# Altium PCB Capstone PCB.PcbDoc
Units mil, origin at the board's own origin, x right, y up, seen from the top; angles counter-clockwise.
Board outline 2137 x 2596 mil, 2 copper layers (Top Layer, Bottom Layer); 37 components, 39 nets, 157 pads, 7 vias.
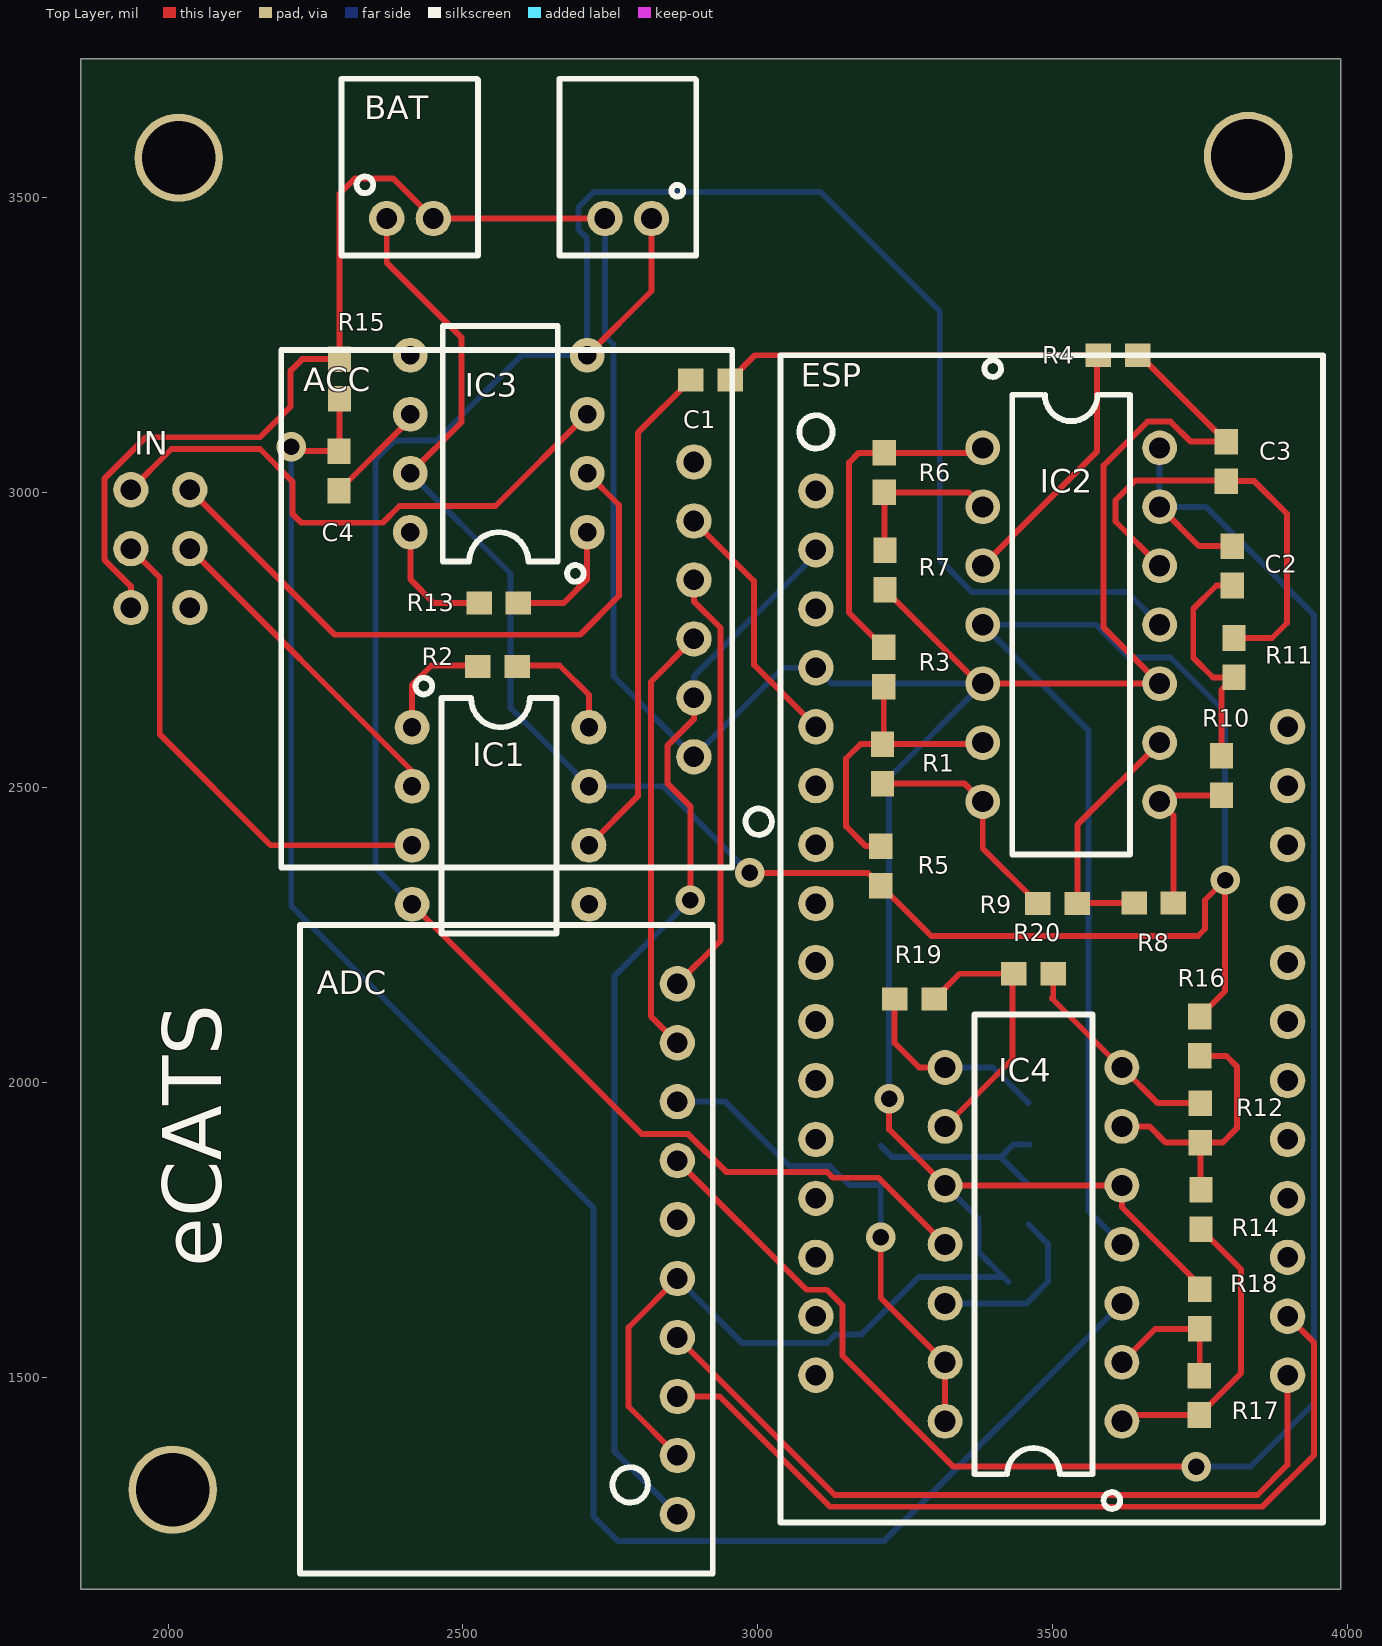
[diagram p0: Top Layer view]
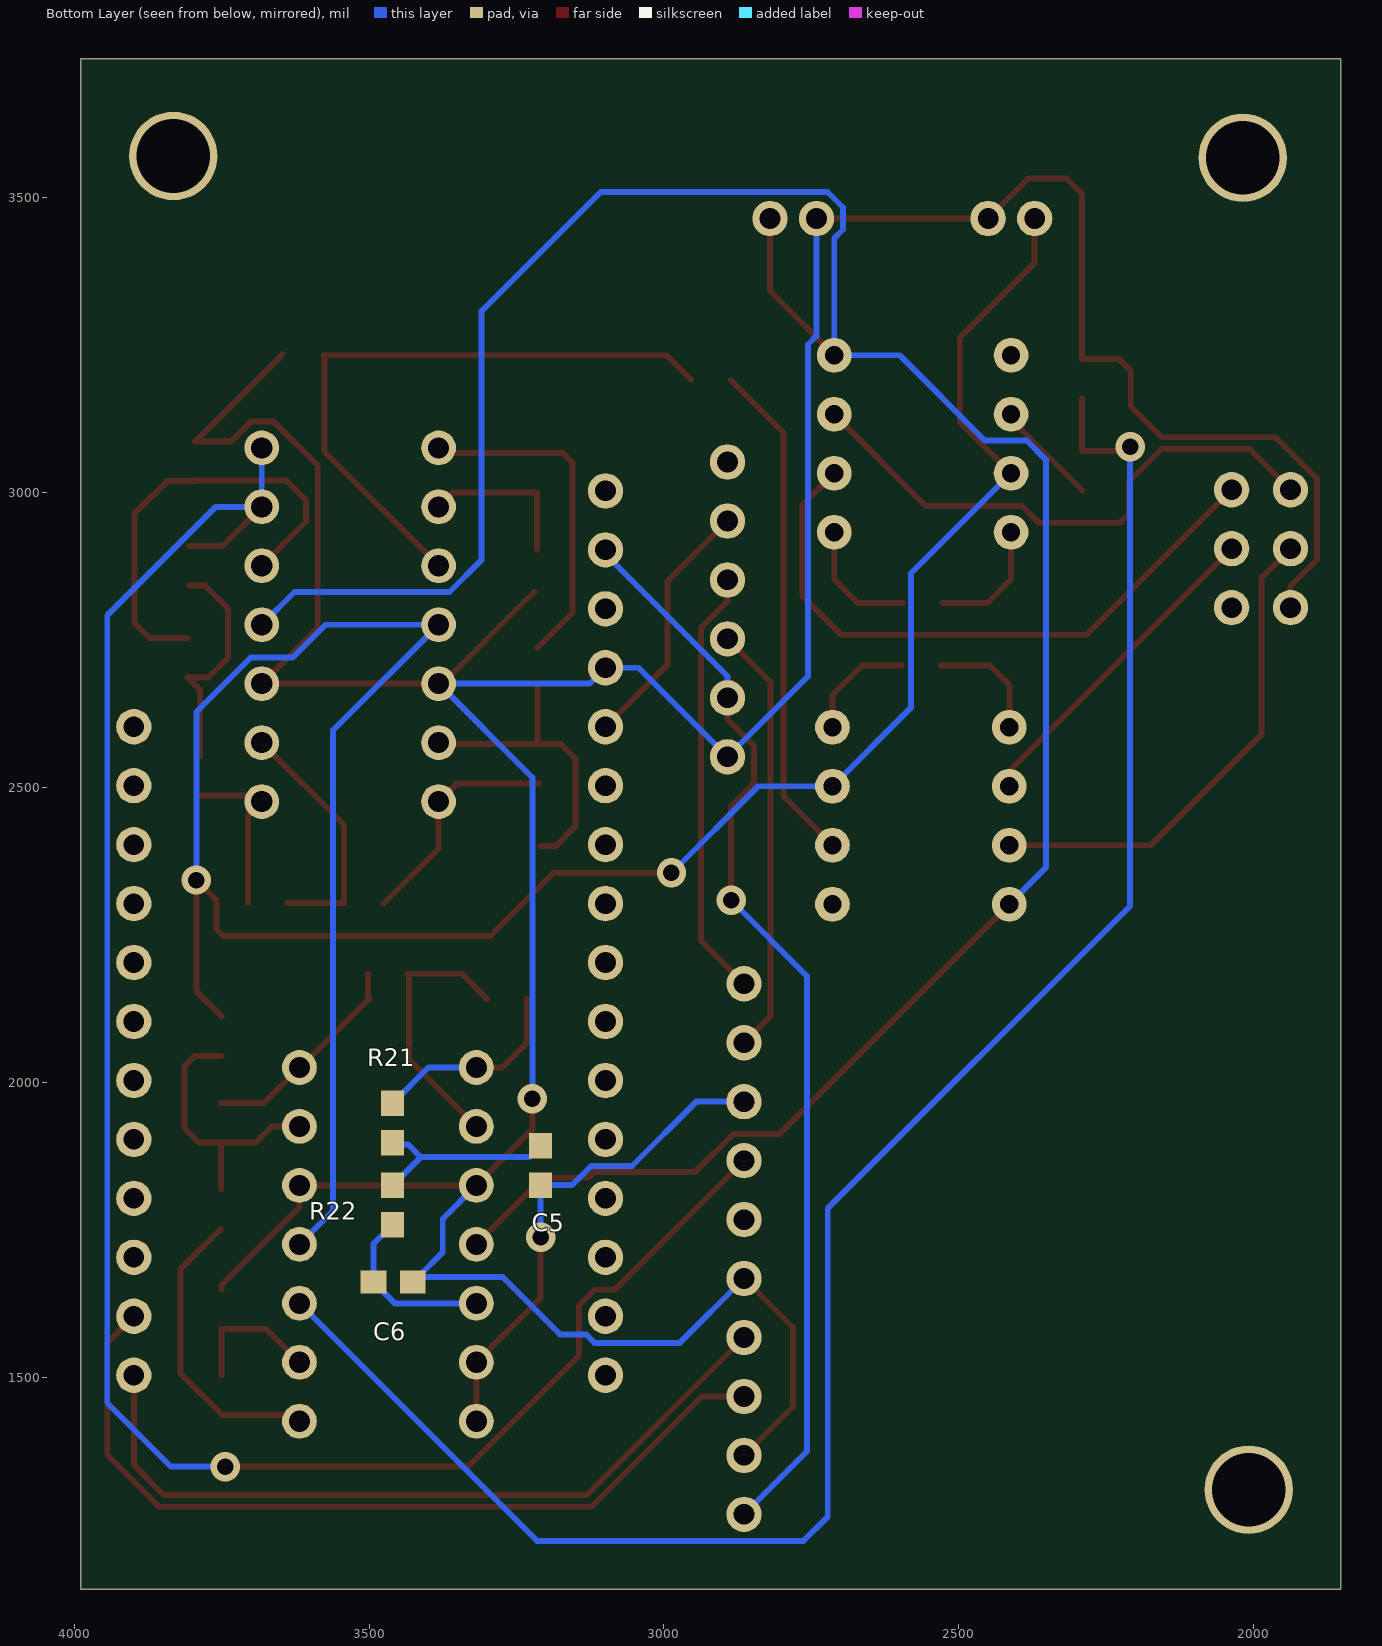
[diagram p1: Bottom Layer view, seen from below]

## Layer stack, top to bottom
Top Solder: solder mask 0.4, Solder Resist, Dk 3.5
Top Layer: signal copper 1.4
Dielectric 1: dielectric 12.6, FR-4, Dk 4.8
Bottom Layer: signal copper 1.4
Bottom Solder: solder mask 0.4, Solder Resist, Dk 3.5

## Board outline
1852,1140 1852,3736 3989,3736 3989,1140

## Design rules (kind name [scope] priority, off if disabled: settings)
Clearance [All] p1: gap=10
ComponentClearance ComponentClearance_1 [All] p1: gap=0 collisioncheckmode=3 verticalgap=0 showdistances=FALSE
ComponentClearance ADCClearance [All] p2: gap=0 collisioncheckmode=3 verticalgap=0 showdistances=FALSE
ComponentClearance ADCClearance2 [InComponent('*3') vs InComponent('IC3')] p3: gap=0 collisioncheckmode=3 verticalgap=0 showdistances=FALSE
ComponentClearance FeatherClearance2 [InComponent('*') vs InComponent('IC4')] p4: gap=0 collisioncheckmode=3 verticalgap=0 showdistances=FALSE
ComponentClearance FeatherClearance1 [InComponent('*') vs InComponent('IC2')] p5: gap=0 collisioncheckmode=3 verticalgap=0 showdistances=FALSE
ComponentClearance [All] p6: gap=10 collisioncheckmode=3 verticalgap=10 showdistances=FALSE
PolygonConnect [All] p1: connectstyle=Relief reliefconductorwidth=10 reliefentries=4 polygonreliefangle="90 Angle" airgapwidth=10
RoutingVias [All] p1: holewidth=28 width=50 viastyle="Through Hole" minholewidth=28 minwidth=50 maxholewidth=250 maxwidth=250
SolderMaskExpansion [All] p1: expansion=4
Width [All] p1: maxlimit=10 minlimit=10 preferedwidth=10
29 further rules are at their usual default settings.

## Components (designator, comment, footprint, x,y, rotation, side; value= is the part's Value field where it differs from the comment)
ACC "ADXL377" ADXL377_Acc 2892,2552 r180 top (schematic designator *1)
ADC "ADC" ADC 2864,1267 r180 top (schematic designator *3)
BAT "BATTERY_JST" BATTERY_JST 2324,3432 r0 top (schematic designator *4)
C1 "2.2nF" CAP_0603 2920,3191 r0 top
C2 "330nF" CAP_0603 3805,2876 r270 top
C3 "Cap" CAP_0603 3795,3053 r270 top
C4 "2.2nF" CAP_0603 2290,3037 r90 top
C5 "Cap" CAP_0603 3209,1859 r90 bottom
C6 "Cap" CAP_0603 3459,1661 r0 bottom
ESP "FEATHER_HUZZAH" Feather_Huzzah 3099,3003 r0 top (schematic designator *)
IC1 "LT1920 OpAmp" LT1920 2414,2602 r0 top
IC2 "TCL2277 OpAmp" TLC2277 3382,3076 r0 top
IC3 "LT1920 OpAmp" LT1920 2711,2933 r180 top
IC4 "TCL2277 OpAmp" TLC2277 3618,1425 r180 top
IN "EEG_INPUT" EEG_INPUT 1937,2805 r90 top (schematic designator *2)
R1 "1k" RES_0603 3212,2540 r270 top
R2 "499ohm" RES_0603 2559,2705 r0 top
R3 "1k" RES_0603 3214,2704 r270 top
R4 "71.5k" RES_0603 3611,3233 r180 top
R5 "2k" RES_0603 3209,2367 r90 top
R6 "1M" RES_0603 3215,3034 r90 top
R7 "4.99k/499ohm" RES_0603 3216,2869 r90 top
R8 "1k" RES_0603 3672,2304 r0 top
R9 "1k" RES_0603 3509,2303 r0 top
R10 "80.6k" RES_0603 3787,2520 r90 top
R11 "178k" RES_0603 3808,2720 r90 top
R12 "1k" RES_0603 3751,1931 r90 top
R13 "499ohm" RES_0603 2561,2813 r180 top
R14 "1k" RES_0603 3752,1784 r90 top
R15 "71.5k" RES_0603 2291,3193 r270 top
R16 "2k" RES_0603 3750,2078 r270 top
R17 "1M" RES_0603 3749,1469 r270 top
R18 "4.99k/499ohm" RES_0603 3750,1615 r270 top
R19 "1k" RES_0603 3266,2141 r180 top
R20 "1k" RES_0603 3468,2184 r180 top
R21 "80.6k" RES_0603 3460,1931 r270 bottom
R22 "178k" RES_0603 3460,1792 r270 bottom

## Footprints (in the part's own frame and the unit in brackets; to place one, negate y for a bottom-side part, rotate by r counter-clockwise, add the part's x,y. Pads: shape width x height; smd on the part's side, far side on the other; paste and mask are expansions set on the pad)
ADC [mil]
  round 60 hole 35: A0(0,-600) A1(0,-700) A2(0,-800) A3(0,-900) ADDR(0,-400) ALRT(0,-500) GND(0,-100) SCL(0,-200) SDA(0,-300) VDD(0,0)
  silkscreen extent -60,-1000 640,100
ADXL377_Acc [mil]
  round 60 hole 35: 3.3V(0,-100) GND(0,0) ST(0,-500) X(0,-200) Y(0,-300) Z(0,-400)
  silkscreen extent -132,-690 700,188
BATTERY_JST [mil]
  round 60 hole 35: GND1(126,33) GND2(417,33) V+(47,33) V-(496,33)
  silkscreen extent -30,-30 572,270
CAP_0603 [mm] "Chip Capacitor, 2-Leads, Body 1.60x0.80mm, IPC Low Density"
  rect 1.1x1 smd: 1(-0.85,0) 2(0.85,0)
  body extent -0.87,-0.48 0.87,0.47, height 0.85
EEG_INPUT [mil]
  round 60 hole 35: 1V+(100,0) 1V-(100,-100) 2V+(200,0) 2V-(200,-100) GND(0,0) NULL(0,-100)
Feather_Huzzah [mil] "ESP8266 Feather Breakout Board"
  round 60 hole 35: 0(800,-1100) 2(800,-1300) 3V(0,-100) 12(800,-800) 13(800,-900) 14(800,-700) 15(800,-1000) 16(800,-1200) ADC(0,-400) BAT(800,-400) CHPD(0,-1500) EN(800,-500) GND(0,-300) M0(0,-1100) M1(0,-1200) NC1(0,-200) NC2(0,-500) NC3(0,-600) NC4(0,-700) NC5(0,-800) NC6(0,-900) RST(0,0) RX(0,-1300) SCK(0,-1000) SCL(800,-1400) SDA(800,-1500) TX(0,-1400) USB(800,-600)
  silkscreen extent -60,-1750 860,230
LT1920 [mm] "LT1920 OpAmp"
  round 1.5 hole 0.783: 1(0,0) 2(0,-2.54) 3(0,-5.08) 4(0,-7.62) 5(7.62,-7.62) 6(7.62,-5.08) 7(7.62,-2.54) 8(7.62,0)
  silkscreen extent 0.15,-8.89 6.22,2.14
RES_0603 [mm] "Chip Resistor, 2-Leads, Body 1.60x0.82mm, IPC Low Density"
  rect 1.1x1 smd: 1(-0.85,0) 2(0.85,0)
  body extent -0.85,-0.48 0.85,0.48, height 0.6
TLC2277 [mm] "TLC2277 OpAmp"
  round 1.5 hole 0.91: 1(0,0) 2(0,-2.54) 3(0,-5.08) 4(0,-7.62) 5(0,-10.16) 6(0,-12.7) 7(0,-15.24) 8(7.62,-15.24) 9(7.62,-12.7) 10(7.62,-10.16) 11(7.62,-7.62) 12(7.62,-5.08) 13(7.62,-2.54) 14(7.62,0)
  silkscreen extent 0.07,-17.53 6.35,3.78

## Part data
C1 C2 C4: library part "CAP SEMI MLCC"
C3 C5 C6: "Capacitor"
IC2 IC4: library part TCL2277
R1 R2 R3 R4 R5 R6 R7 R8 R9 R10 R11 R12 R13 R14 R15 R16 R17 R18 R19 R20 R21 R22: library part "RES SEMI (1.0%)", "1.0%"

## Free pads (board coordinates)
  round 150 hole 125: Hole(2008,1309) Hole(2018,3568) Hole(3832,3571)

## Via types
v1: diameter 50, hole 28, Top Layer to Bottom Layer, 7 vias

## Nets (pads, with @x,y where several pads share a name; then routed paths per layer and width w, separated by ;. In a path a pad name is that pad's centre, name@x,y a point inside that pad or via, vN(x,y) a via of type N, cw(c..) or ccw(c..) an arc to the next point about the centre after c; other vN are vias at no path point)
3V: ACC.3.3V ADC.VDD ESP.3V | length 1854.3
  Top Layer w10: v1(2886,2309) 2886,2468 2847,2507 2847,2570.64 2892,2615.64 ACC.3.3V
  Bottom Layer w10: ADC.VDD 2757,1374 2757,2180 v1(2886,2309) ; ACC.3.3V 2892,2688.36 3099,2895.36 ESP.3V
+VS: BAT.V+ IC1.7 IC2.4 IC3.7 IC4.4 R5.1 R16.1 | length 4584.8
  Top Layer w10: BAT.V+ 2371,3390 2498,3263 2498,3120 IC3.7 ; v1(2987,2355) 3187.54,2355 R5.1 3294.54,2248 3747,2248 3759,2260 3759,2309 v1(3793,2343) 3793,2154.46 R16.1
  Bottom Layer w10: IC3.7 2581,2863 2581,2635 IC1.7 2840,2502 v1(2987,2355) ; IC4.4 3561,1782 3561,2597 IC2.4 3574,2776 3629.47,2720.53 3700.44,2720.53 3793,2627.97 v1(3793,2343)
-VS: BAT.V- IC1.4 IC2.11 IC3.4 IC4.11 | length 4437.1
  Top Layer w10: IC1.4 2804,1912 2882.64,1912 2946.64,1848 3117.64,1848 3127.64,1838 3205,1838 IC4.11 ; IC3.4 2820,3342 BAT.V-
  Bottom Layer w10: IC1.4 2352,2364 2352,3056 2384.47,3088.47 2455.53,3088.47 2600.06,3233 IC3.4 2711,3431.36 2696,3446.36 2696,3483.64 2722.36,3510 3107,3510 3309,3308 3309,2886.03 3363.56,2831.47 3626.53,2831.47 IC2.11
GND: ACC.GND ADC.ADDR ADC.GND BAT.GND1 BAT.GND2 C3.1 C6.1 ESP.GND IC2.5 IC2.10 IC4.5 IC4.10 IN.GND R4.1 R7.1 R15.1 R18.1 | length 7188.1
  Top Layer w10: IN.GND@1915,2805 IN.GND 1937,2841.36 1892,2886.36 1892,3023.64 1962.36,3094 2156,3094 2208,3146 2208,3207 2227.46,3226.46 R15.1 2291,3507 2317,3533 2382,3533 BAT.GND1 BAT.GND2 ; ADC.GND 2781,1450 2781,1584 ADC.ADDR ; R7.1@3220.06,2831.47 IC2.5@3375.54,2676 ; v1(3223,1972) 3223,1920 IC4.10 IC4.5 3618,1787.97 3750,1655.97 R18.1 ; IC2.5 IC2.10 3587,2771 3587,3046 3661.53,3120.53 3700.44,3120.53 3734.51,3086.46 C3.1 R4.1@3646.46,3235
  Bottom Layer w10: BAT.GND2 2741,3265.97 2755.53,3251.44 2755.53,2688.47 ACC.GND 3043,2703 ESP.GND 3126,2676 IC2.5 3223,2517 v1(3223,1972) ; ADC.ADDR 2973,1558 3117.64,1558 3131.64,1572 3175.94,1572 3273.47,1669.53 C6.1@3417.01,1669.53 ; IC4.10 3375,1768 3375,1711.54 C6.1@3417.01,1669.53 ; C6.1 C6.1@3417.01,1669.53
Net*1_X: ACC.X ADC.A2 | length 733.9
  Top Layer w10: ADC.A2 2819,2112 2819,2679 ACC.X
Net*1_Y: ACC.Y ADC.A3 | length 733.9
  Top Layer w10: ADC.A3 2937,2240 2937,2770.64 2892,2815.64 ACC.Y
Net*1_Z: ACC.Z ESP.ADC | length 434.7
  Top Layer w10: ACC.Z 2994,2850 2994,2708 ESP.ADC
Net*2_1V+: IC1.3 IN.1V+ | length 841.2
  Top Layer w10: IN.1V+ 1986,2856 1986,2590 2174,2402 IC1.3
Net*2_1V-: IC1.2 IN.1V- | length 533.2
  Top Layer w10: IN.1V- IC1.2@2414,2528
Net*2_2V+: IC3.3 IN.2V+ | length 962.8
  Top Layer w10: IN.2V+ 2006,3074 2156,3074 2211,3019 2211,2964 2226,2949 2364.03,2949 2392.56,2977.53 2555.53,2977.53 IC3.3
Net*2_2V-: IC3.2 IN.2V- | length 1087.6
  Top Layer w10: IN.2V- 2283,2759 2699,2759 2765,2825 2765,2979 IC3.2
Net*3_A0: ADC.A0 C2.1 IC2.13 IC2.14 | length 3314.6
  Top Layer w10: ADC.A0 3083,1648 3117.64,1648 3144,1621.64 3144,1536.03 3332.03,1348 v1(3744,1348) ; IC2.13 3748.54,2909.46 C2.1
  Bottom Layer w10: IC2.14 IC2.13 3760,2976 3944,2792 3944,1456 3836,1348 v1(3744,1348)
Net*3_A1: ADC.A1 C5.1 IC4.13 IC4.14 | length 849.3
  Top Layer w10: v1(3209,1737) 3209,1634 IC4.13 IC4.14
  Bottom Layer w10: ADC.A1 2945,1967 3054,1858 3123,1858 3155.46,1825.54 C5.1 v1(3209,1737)
Net*3_SCL: ADC.SCL ESP.SCL | length 1447.7
  Top Layer w10: ADC.SCL 2935.72,1467 3122.72,1280 3856.28,1280 3944,1367.72 3944,1558 ESP.SCL
Net*3_SDA: ADC.SDA ESP.SDA | length 1318.7
  Top Layer w10: ADC.SDA 3131,1300 3848,1300 3899,1351 ESP.SDA
NetC1_1: C1.1 IC1.6 | length 860.5
  Top Layer w10: IC1.6 2797,2485 2797,3101.46 C1.1
NetC1_2: C1.2 IC2.3 R4.2 | length 1078.6
  Top Layer w10: C1.2 2995.46,3233 R4.2@3575.54,3233 ; IC2.3 3575.54,3069.53 R4.2@3575.54,3233 ; R4.2 R4.2@3575.54,3233
NetC2_2: C2.2 R10.2 R11.1 | length 390
  Top Layer w10: R10.2 3787,2665.54 R11.1 3772.46,2686.54 3739,2720 3739,2803 3778.54,2842.54 C2.2
NetC3_2: C3.2 IC2.12 R11.2 | length 756.5
  Top Layer w10: IC2.12 3607,2951 3607,2987 3640.53,3020.53 3795,3020.53 C3.2 3842.46,3019.54 3898,2964 3898,2779 3872.46,2753.46 R11.2
NetC4_1: C4.1 IC3.6 | length 171.1
  Top Layer w10: C4.1 IC3.6@2411,3124.54
NetC4_2: C4.2 IC4.3 R15.2 | length 3294.6
  Top Layer w10: v1(2209,3078) 2216.54,3070.46 C4.2 ; C4.2@2291,3071.46 R15.2
  Bottom Layer w10: v1@2194,3078 v1(2209,3078) 2209,2299 2722,1786 2722,1263 2763,1222 3215,1222 IC4.3
NetC5_2: C5.2 R21.2 R22.1 | length 336.2
  Bottom Layer w10: C5.2 3228.46,1873 3412.46,1873 ; R22.1 3412.46,1873 ; R21.2@3461,1894.54 3434,1894.54 3412.46,1873
NetC6_2: C6.2 IC4.12 R22.2 | length 300.4
  Bottom Layer w10: IC4.12 3456.46,1625 C6.2 3492.46,1726.07 R22.2
NetIC1_1: IC1.1 R2.1 | length 201.2
  Top Layer w10: IC1.1 2414,2674 2447,2707 R2.1@2529.54,2707
NetIC1_8: IC1.8 R2.2 | length 193.2
  Top Layer w10: R2.2@2596.46,2707 2664,2707 2714,2657 IC1.8
NetIC2_1: IC2.1 R3.1 R6.2 | length 563.3
  Top Layer w10: R3.1 3155,2796.46 3155,3051 3171.46,3067.46 R6.2 IC2.1@3373.47,3067.46
NetIC2_2: IC2.2 R6.1 R7.2 | length 274.2
  Top Layer w10: R7.2@3215,2903.46 R6.1 3357.46,3000.54 IC2.2
NetIC2_6: IC2.6 R1.1 R3.2 R5.2 | length 525.4
  Top Layer w10: R5.2 3183.54,2400.46 3150,2434 3150,2549 3174.46,2573.46 R1.1 ; R3.2 3214,2575.46 R1.1 ; IC2.6@3379.46,2573.46 R1.1
NetIC2_7: IC2.7 R1.2 R9.1 | length 394.4
  Top Layer w10: R1.2 3351.46,2506.54 IC2.7 3382,2396.54 R9.1
NetIC2_8: IC2.8 R8.2 R10.1 | length 276.2
  Top Layer w10: IC2.8 3705.46,2452.54 R8.2 ; IC2.8@3692.54,2486.54 R10.1
NetIC2_9: IC2.9 R8.1 R9.2 | length 427.3
  Top Layer w10: R8.1 3543.46,2304 R9.2 3542.46,2436.46 IC2.9
NetIC3_1: IC3.1 R13.1 | length 213.1
  Top Layer w10: R13.1 2671,2813 2711,2853 IC3.1
NetIC3_8: IC3.8 R13.2 | length 213.1
  Top Layer w10: IC3.8 2411,2853 2451,2813 R13.2
NetIC4_1: IC4.1 R14.1 R17.2 | length 507.9
  Top Layer w10: IC4.1 3628.53,1435.54 R17.2 3820,1506.54 3820,1682.54 R14.1
NetIC4_2: IC4.2 R17.1 R18.2 | length 233.5
  Top Layer w10: IC4.2 3674.53,1581.54 R18.2 R17.1@3750,1503.46
NetIC4_6: IC4.6 R12.1 R14.2 R16.2 | length 470.8
  Top Layer w10: IC4.6 3665,1925 3692.46,1897.54 R12.1 ; R16.2 3795.46,2044.54 3813,2027 3813,1922 3788.54,1897.54 R12.1 ; R14.2@3751,1818.46 R12.1
NetIC4_7: IC4.7 R12.2 R20.1 | length 363.5
  Top Layer w10: 3499.46,2142 IC4.7@3616.46,2025 ; 3501.46,2144 R20.1 ; IC4.7 3678.54,1964.46 R12.2
NetIC4_8: IC4.8 R19.2 R21.1 | length 344.2
  Top Layer w10: R19.2 3232.54,2066.46 3274,2025 IC4.8
  Bottom Layer w10: IC4.8 3399.46,2025 R21.1
NetIC4_9: IC4.9 R19.1 R20.2 | length 457.3
  Top Layer w10: R19.1 3342.46,2184 R20.2 ; IC4.9 3432.54,2039.54 R20.2@3432.54,2182
pads on no net: ACC.ST ADC.ALRT ESP.0 ESP.2 ESP.12 ESP.13 ESP.14 ESP.15 ESP.16 ESP.BAT ESP.CHPD ESP.EN ESP.M0 ESP.M1 ESP.NC1 ESP.NC2 ESP.NC3 ESP.NC4 ESP.NC5 ESP.NC6 ESP.RST ESP.RX ESP.SCK ESP.TX ESP.USB IC1.5 IC3.5 IN.NULL

## Silkscreen, mask and mechanical layers (free items; w line width, h text height)
Top Overlay:
  text "eCATS" at 2090,1686 h100 r90
Mechanical 1:
  the board outline again, w10